# Altium PCB standos.PcbDoc (part 2 of 2)
Units mil, origin at the board's own origin, x right, y up, seen from the top; angles counter-clockwise.
Board outline 11023.62 x 8464.57 mil, 2 copper layers (Top Layer, Bottom Layer); 116 components, 136 nets, 701 pads, 0 vias.
Unrouted connection lines stored in the file: 409.
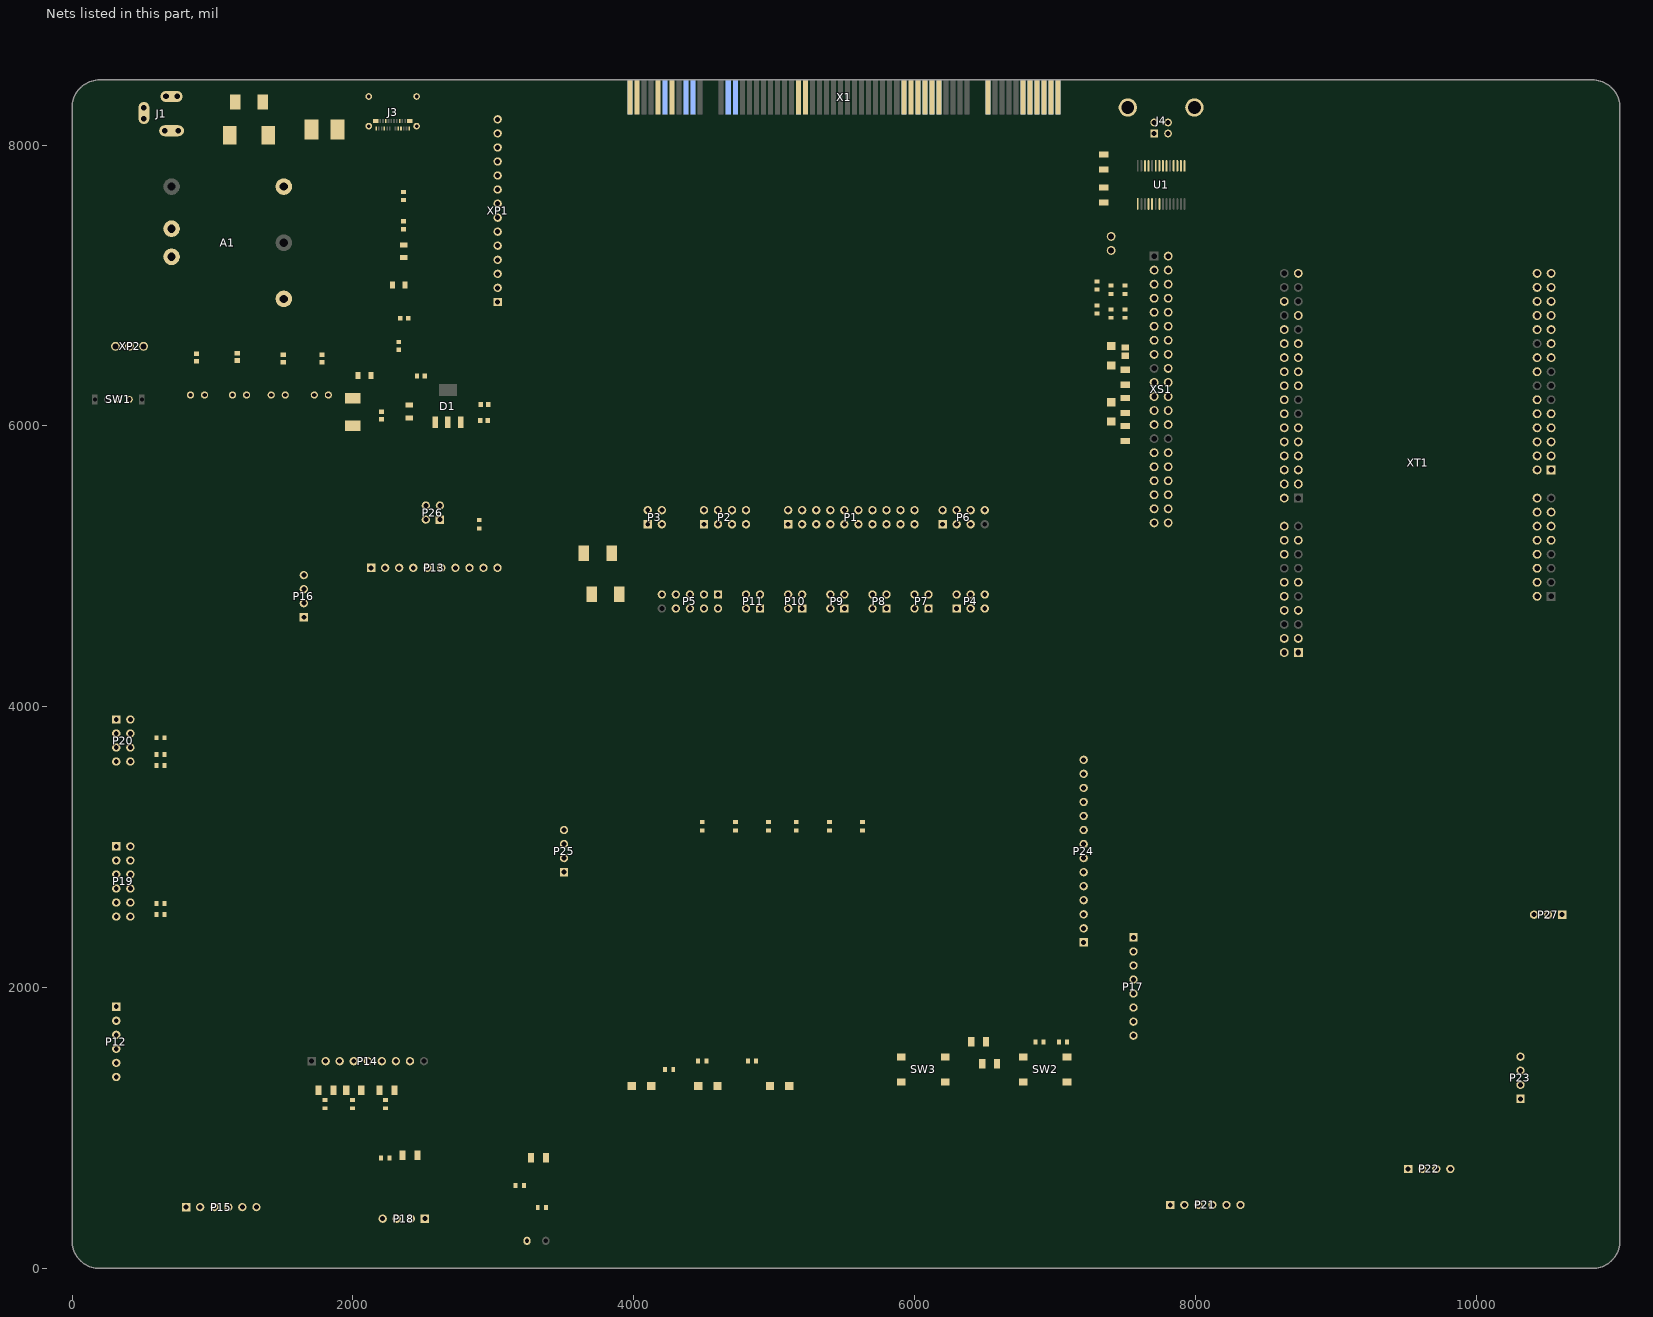
[diagram p2: the nets of this part, all layers, seen from the top]

## Part data
C1 C6 C8 C9 C13 C14 C15 C16 C17 C18 C19 C20 C21 C22 C23 C24: "Capacitor (Semiconductor SIM Model)", LatestRevisionDate=29-May-2009, LatestRevisionNote="IPC-7351 Footprint Added.", PackageDescription="Chip Capacitor", PackageReference=C1206, Published=8-Jun-2000, Publisher="Altium Limited"
C2 C3: "Polarized Capacitor (Surface Mount)", Voltage=50V, LatestRevisionDate=29-May-2009, LatestRevisionNote="IPC-7351 Footprint Added.", PackageDescription="Chip Capacitor", PackageReference=C0805, Published=8-Jun-2000, Publisher="Altium Limited"
C4: "Polarized Capacitor (Surface Mount)", Voltage=10V, LatestRevisionDate=29-May-2009, LatestRevisionNote="IPC-7351 Footprint Added.", PackageDescription=E-case, PackageReference=C0805, Published=8-Jun-2000, Publisher="Altium Limited"
C5: "Capacitor (Semiconductor SIM Model)", PartNumber=TCC1206X7R105K500HT, Voltage=50V, LatestRevisionDate=29-May-2009, LatestRevisionNote="IPC-7351 Footprint Added.", PackageDescription="Chip Capacitor", PackageReference=C1206, Published=8-Jun-2000, Publisher=https://www.smd.ru/katalog/kondensatory/keramicheskie/1206_1210/
C7 C12: "Polarized Capacitor (Surface Mount)", LatestRevisionDate=29-May-2009, LatestRevisionNote="IPC-7351 Footprint Added.", PackageDescription="Chip Capacitor", PackageReference=C0805, Published=8-Jun-2000, Publisher="Altium Limited"
C10: Case=0603, Dielectric=X7R, PartNumber=GRM188R71H104KA93D, Tolerance=±10%, Voltage="50 B"
C11: Case=0603, Dielectric=X5R, PartNumber=GRM188R60J106ME84D, Tolerance=±20%, Voltage="6,3 B"
D1: Case=SOT-223, Manufacturer="ST Microelectronics", PartNumber=LD1117S33CTR
D2 D3 D4 D5 D6: "Typical RED, GREEN, YELLOW, AMBER GaAs LED", LatestRevisionDate=17-Jul-2002, LatestRevisionNote="Re-released for DXP Platform.", PackageDescription="SM LED; 2 Flat Leads", PackageReference=3.2X1.6X1.1, PackageVersion=Feb-2002, Published=8-Jun-2000, Publisher="Altium Limited"
F1 F2 F4 F5: library part F, "045303.5MR"
J1: "Low Voltage Power Supply Connector", ComponentLink1Description="Manufacturer Link", ComponentLink1URL=http://domino.kycon.com/internet/Products.html, DatasheetDocument=09-May-2002, Published=17-Dec-2003, Publisher="Altium Limited"
J2: "Diode Schottky 60V 5A Surface Mount SMC (DO-214AB)", Package="DO-214AB-214 Diotec Semiconductor", Availability="In Stock", Check_prices=https://www.snapeda.com/parts/SK56/Diotec/view-part/5719358/?ref=eda, MF="Diotec Semiconductor", MP=SK56, Price=None, SnapEDA_Link=https://www.snapeda.com/parts/SK56/Diotec/view-part/5719358/?ref=snap
J3: Package=None, Availability=Unavailable, MP=105450-0101, Price=None
J4: "USB-B (USB TYPE-B) USB 2.0 Receptacle Connector 4 Position Through Hole, Right Angle", Package=None, Availability=Unavailable, MP=USB-B-S-X-X-TH, Price=None
L1: "Power Choke Shielded Wirewound 4.7uH 20% 100KHz Metal 4.8A 39.6mOhm DCR Automotive T/R", Package="SMD-2 Panasonic", Availability="In Stock", Check_prices=https://www.snapeda.com/parts/ETQP4M4R7YFP/Panasonic/view-part/1533841/?ref=eda, MF=Panasonic, MP=ETQP4M4R7YFP, Price=None, Purchase-URL=https://pricing.snapeda.com/search/part/ETQP4M4R7YFP/?ref=eda, SnapEDA_Link=https://www.snapeda.com/parts/ETQP4M4R7YFP/Panasonic/view-part/1533841/?ref=snap
P1: "Header, 10-Pin, Dual row", LatestRevisionDate=17-Jul-2002, LatestRevisionNote="Re-released for DXP Platform.", Publisher="Altium Limited"
P2 P6 P20: "Header, 4-Pin, Dual row", LatestRevisionDate=17-Jul-2002, LatestRevisionNote="Re-released for DXP Platform.", Publisher="Altium Limited"
P3 P7 P8 P9 P10 P11 P26: "Header, 2-Pin, Dual row", LatestRevisionDate=17-Jul-2002, LatestRevisionNote="Re-released for DXP Platform.", Publisher="Altium Limited"
P4: "Header, 3-Pin, Dual row", LatestRevisionDate=17-Jul-2002, LatestRevisionNote="Re-released for DXP Platform.", Publisher="Altium Limited"
P5: "Header, 5-Pin, Dual row", LatestRevisionDate=17-Jul-2002, LatestRevisionNote="Re-released for DXP Platform.", Publisher="Altium Limited"
P12 P15 P21: "Header, 6-Pin", LatestRevisionDate=17-Jul-2002, LatestRevisionNote="Re-released for DXP Platform.", Publisher="Altium Limited"
P13: "Header, 10-Pin", LatestRevisionDate=17-Jul-2002, LatestRevisionNote="Re-released for DXP Platform.", Publisher="Altium Limited"
P14: "Header, 9-Pin", LatestRevisionDate=17-Jul-2002, LatestRevisionNote="Re-released for DXP Platform.", Publisher="Altium Limited"
P16 P18 P22 P23 P25: "Header, 4-Pin", LatestRevisionDate=17-Jul-2002, LatestRevisionNote="Re-released for DXP Platform.", Publisher="Altium Limited"
P17: "Header, 8-Pin", LatestRevisionDate=17-Jul-2002, LatestRevisionNote="Re-released for DXP Platform.", Publisher="Altium Limited"
P19: "Header, 6-Pin, Dual row", LatestRevisionDate=17-Jul-2002, LatestRevisionNote="Re-released for DXP Platform.", Publisher="Altium Limited"
P24 XP1: "Header, 14-Pin", LatestRevisionDate=17-Jul-2002, LatestRevisionNote="Re-released for DXP Platform.", Publisher="Altium Limited"
P27: "Header, 3-Pin", LatestRevisionDate=17-Jul-2002, LatestRevisionNote="Re-released for DXP Platform.", Publisher="Altium Limited"
R1 R3 R4: Case=0603, PartNumber=RC0603JR-07330кL, Power="0,1 Вт", Tolerance=±5%
R2 R6 R7 R8 R9 R10 R11 R12 R14 R15 R16 R17 R18 R19 R20 R21 R22 R23 R24 R25 R26 R27 R28 R29 R31 R32 R33 R34 R35 R36: "Resistor", LatestRevisionDate=29-May-2009, LatestRevisionNote="IPC-7351 Footprint Added.", PackageDescription="Chip Resistor", PackageReference=J1-0603, Published=8-Jun-2000, Publisher="Altium Limited"
R5: Case=0603, PartNumber=RC0603JR-07150кL, Power="0,1 Вт", Tolerance=±5%
R13: library part "Light Sensor", PartNumber=GL5516
SW1: library part SW, PartNumber=KLS7-SS03-12D02-EG-3.0
SW2 SW3: "WS-TASV SMD Tact Switch 6X6 mm", ComponentLink1Description="Manufacturer URL", ComponentLink1URL=http://www.we-online.com, ComponentLink2Description=Datasheet, ComponentLink2URL=http://katalog.we-online.de/em/datasheet/4301x2.pdf, NoPins=04, PackageReference=430152043826, PartNumber=430152043826
U1: "USB UART Asynchronous Serial Data Transfer Chip, 28-pin SSOP, Tape and Reel", Manufacturer=FTDI, ComponentLink1Description="Manufacturer URL", ComponentLink1URL=http://www.ftdichip.com/, ComponentLink2Description=Datasheet, ComponentLink2URL=http://www.ftdichip.com/Support/Documents/DataSheets/ICs/DS_FT232R.pdf, DatasheetVersion="ver 2.10, Mar-2012", PackageDescription="28-Pin Small Outline Package 0.65 mm Pitch", PackageReference=SSOP-28, PackageVersion=Mar-12, PartNumber=FT232RL-Reel
VD1: library part VD, PartNumber=GNL-3012HD
VD2: library part VD, PartNumber=GNL-3012YD
VD3: library part VD, PartNumber=GNL-3012GD
VD4: library part VD, PartNumber=GNL-3014BC
XP2: library part JP3, PartNumber=PLS-3
XP3: library part JP2, PartNumber=MJ-O-8KLS, Company="KLS electronic co ltd"
XS1: 1=VCC3V3, 2=VCC5V, 3=GPIO2/SDA1, 4=VCC5V, 5=GPIO3/SCL1, 6=GND, 7=GPIO4/GPIO_GCLK, 8=GPIO14/TXD0, 9=GND, 10=GPIO15/RXD0, 11=GPIO17/GPIO_GEN0, 12=GPIO18/GPIO_GEN1, 13=GPIO27/GPIO_GEN2, 14=GND, 15=GPIO22/GPIO_GEN3, 16=GPIO23/GPIO_GEN4, 17=VCC3V3, 18=GPIO24/GPIO_GEN5, 19=GPIO10/SPI_MOSI, 20=GND, 21=GPIO9/SPI_MISO, 22=GPIO25/GPIO_GEN6, 23=GPIO11/SPI_SCLK, 24=GPIO8/SPI_CE0_N, 25=GND, 26=GPIO7/SPI_CE1_N, 27=ID_SD, 28=ID_SC, 29=GPIO5, 30=GND, 31=GPIO6, 32=GPIO12, 33=GPIO13, 34=GND, 35=GPIO19, 36=GPIO16, 37=GPIO26, 38=GPIO20, 39=GND, 40=GPIO21

## Nets (pads, with @x,y where several pads share a name; then routed paths per layer and width w, separated by ;. In a path a pad name is that pad's centre, name@x,y a point inside that pad or via, vN(x,y) a via of type N, cw(c..) or ccw(c..) an arc to the next point about the centre after c; other vN are vias at no path point)
3V3: C11.2 D1.2 F4.1 P1.19 R5.1 R6.1 R7.1
5V: C10.2 D1.1 F2.1 R4.1 SW1.2
+5VIN: X1.A3 X1.A4 X1.A5 XP1.14
+15VIN: X1.B1 X1.B2 XP1.12
-15VIN: X1.A1 X1.A2 XP1.13
ACH0+: X1.A48 XP1.6
ACH1+: X1.A47 XP1.5
ADC.ALRT: P3.2 P13.5 XT1.CN9_3
ADC.I2C.SCL: P12.3 P13.8 P20.4 R6.2 XS1.5 XT1.CN7_2
ADC.I2C.SDA: P12.4 P13.7 P20.6 R7.2 XS1.3 XT1.CN7_4
ADC_A0: C18.1 P13.4 R15.2
ADC_A1: C23.1 P13.3 R23.2
ADC_A2: P13.2 P26.4
ADC_A3: P13.1 P26.2
ADC_ADDR: P13.6 R12.2
BTN0: C22.2 R22.2 SW2.1 SW2.3 XS1.15 XT1.CN9_17
BTN1: C24.2 R24.2 SW3.1 SW3.3 XS1.16 XT1.CN7_20
C5V: C12.1 C13.2 C14.2 F2.2 F5.1 P1.20 U1.20 XP3.2 XS1.2 XS1.4 XT1.CN8_9
CLRSENS_INT: P3.3 P12.1 XT1.CN10_33
CLRSENS_RST: P3.4 P12.2 XT1.CN9_22
Current_Hi: X1.B58 XP1.4
Current_Low: X1.A57 XP1.3
DISPLAY.LCD.DC/RS: P5.7 P24.5 XT1.CN8_2
DISPLAY.LCD.RESET: P5.8 P24.4 XT1.CN8_4
DISPLAY.LCD.SPI.MISO: P5.5 P24.9 P24.13 P25.3 R34.2 R35.2 R36.2 XT1.CN9_24
DISPLAY.LCD.SPI.MOSI: P5.6 P24.6 P24.12 P25.2 XT1.CN9_28
DISPLAY.LCD.SPI.nCE: P5.3 P24.3 R31.1 XT1.CN10_11
DISPLAY.LCD.SPI.SCLK: P5.4 P24.7 P24.10 P25.4 XT1.CN9_26
DISPLAY.SDCARD.nCE: P5.1 P25.1 R33.1 XT1.CN10_7
DISPLAY.TOUCH.IRQ: P5.9 P24.14 XT1.CN9_25
DISPLAY.TOUCH.SPI.nCE: P5.2 P24.11 R32.1 XT1.CN10_9
ENCODER.A: P8.1 P15.1 XT1.CN8_14
ENCODER.B: P8.2 P15.2 XT1.CN10_2
ENCODER.BTN: P8.3 P15.3 XT1.CN8_16
ENCODER.SWT: P8.4 P15.4 XT1.CN10_12
FT_3V3: C15.2 R10.2 R11.2 U1.4 U1.17
FT_D_N: R8.1 U1.16
FT_D_P: R9.1 U1.15
FT_RXLED: D3.2 U1.22
FT_TXLED: D2.2 U1.23
FUNC_OUT: X1.A54 XP1.8
GND: A1.6 C4.2 C6.1 C7.2 C8.1 C9.1 C10.1 C11.1 C12.2 C13.1 C14.1 C15.1 C16.1 C17.1 C18.2 C19.2 C20.2 C21.2 C22.1 C23.2 C24.1 D1.3 D4.2 D5.2 D6.2 J3.A1 J3.A12 J3.B1 J3.B12 J3.S1 J3.S2 J3.S3 J3.S4 J4.4 J4.S1 J4.S2 P1.12 P12.5 P13.9 P15.5 P17.6 P18.3 P19.5 P19.11 P20.8 P21.5 P22.4 P23.4 P24.2 P26.1 P26.3 R2.1 R12.1 R14.2 R29.1 R34.1 R35.1 R36.1 SW2.2 SW2.4 SW3.2 SW3.4 U1.7 U1.18 U1.21 U1.25 U1.26 VD1.2 VD2.2 VD3.2 VD4.2 X1.A6 X1.A11 X1.A18 X1.A19 X1.A20 X1.A21 X1.A23 X1.B3 X1.B4 X1.B5 X1.B6 X1.B11 X1.B18 X1.B19 X1.B20 X1.B21 X1.B22 X1.B23 X1.B37 X1.B56 X1.B61 XP1.11 XS1.6 XS1.9 XS1.14 XS1.20 XS1.25 XS1.30 XS1.34 XS1.39 XT1.CN7_8 XT1.CN8_11 XT1.CN8_13 XT1.CN9_12 XT1.CN9_23 XT1.CN10_3 XT1.CN10_5 XT1.CN10_17 XT1.CN10_22 XT1.CN10_27
GYRO_CS: P9.1 P20.3 R28.1 XT1.CN9_16
GYRO_DR: P9.2 P20.5 XT1.CN10_20
GYRO_INT: P9.3 P20.7 XT1.CN9_18
GYRO_SDO: P9.4 P20.1 R29.2 XT1.CN10_18
KEYPAD.Col0: C19.1 P6.1 R18.1 XT1.CN9_27
KEYPAD.Col1: C20.1 P6.3 R17.1 XT1.CN8_12
KEYPAD.Col2: C21.1 P6.5 R16.1 XT1.CN9_8
KEYPAD.Row0: P6.2 P14.3 XT1.CN9_6
KEYPAD.Row1: P6.4 P14.8 XT1.CN9_4
KEYPAD.Row2: P6.6 P14.7 XT1.CN9_2
KEYPAD.Row3: P6.8 P14.5 XT1.CN10_23
Keypad_C0: P14.4 R18.2
Keypad_C1: P14.2 R17.2
Keypad_C2: P14.6 R16.2
LED0: R19.1 XS1.18 XT1.CN10_4
LED1: R20.1 XS1.19 XT1.CN10_6
LED2: R21.1 XS1.21 XT1.CN10_10
MAXSONAR.AN: P11.3 P21.1 XT1.CN9_21
MAXSONAR.PWM: P11.4 P21.4 XT1.CN9_19
MAXSONAR.UART.RX: P11.2 P21.2 XT1.CN9_29
MAXSONAR.UART.TX: P11.1 P21.3 XT1.CN9_30
MICROPHONE_AS: P18.4 R23.1
MICROPHONE_DS: P3.1 P18.1 XT1.CN7_3
NAV.DRDY_M: P2.7 P19.8 XT1.CN7_12
NAV.INT: P2.8 P19.7 XT1.CN9_7
NAV.SPI_3CS.MISO: P2.1 P19.3 XT1.CN8_8
NAV.SPI_3CS.MOSI: P2.2 P19.2 XT1.CN8_10
NAV.SPI_3CS.nCE0: P2.3 P19.1 R26.1 XT1.CN7_17
NAV.SPI_3CS.nCE1: P2.4 P19.9 R25.1 XT1.CN9_1
NAV.SPI_3CS.nCE2: P2.5 P19.10 R27.1 XT1.CN7_10
NAV.SPI_3CS.SCLK: P2.6 P19.4 XT1.CN8_6
NetA1_2: A1.2 C2.2 C3.2 C5.2 C6.2 J1.2 J1.2A J1.2B J1.3 J1.3A J1.3B
NetA1_3: A1.3 C1.2 C3.1 L1.2
NetC2_1: C2.1 C5.1 J2.2 L1.1
NetD2_1: D2.1 R10.1
NetD3_1: D3.1 R11.1
NetD4_1: D4.1 R19.2
NetD5_1: D5.1 R20.2
NetD6_1: D6.1 R21.2
NetF1_1: F1.1 J1.1 J1.1A J1.1B
NetF1_2: F1.2 J2.1
NetJ3_A5: J3.A5 R2.2
NetJ4_1: J4.1 XP3.1
NetP23_2: P23.2 P27.2
NetR1_2: R1.2 VD1.1
NetR3_2: R3.2 VD2.1
NetR4_2: R4.2 VD3.1
NetR5_2: R5.2 VD4.1
NetR13_2: R13.2 R14.1 R15.1
NetSW1_1: SW1.1 XP2.2
P3V3: F4.2 P12.6 P17.8 P24.8 R22.1 R24.1 R25.2 R26.2 R27.2 R28.2 R31.2 R32.2 R33.2
P5V: F5.2 P13.10 P15.6 P18.2 P19.6 P19.12 P20.2 P21.6 P22.1 P23.1 P24.1
PWR_5V: A1.4 C1.1 C4.1 R3.1 XP2.3
RC522_IRQ: P4.5 P17.5 XT1.CN7_1
RC522_MISO: P4.1 P17.4 XT1.CN9_9
RC522_MOSI: P4.2 P17.3 XT1.CN9_5
RC522_RST: P4.6 P17.7 XT1.CN7_11
RC522_SCK: P4.4 P17.2 XT1.CN9_10
RC522_SS: P4.3 P17.1 XT1.CN7_7
RPi_GPIO04: P1.8 XS1.7
RPi_GPIO05: P1.10 XS1.29
RPi_GPIO06: P1.11 XS1.31
RPi_GPIO07: P1.9 XS1.26
RPi_GPIO08: P1.15 XS1.24
RPi_GPIO11: P1.16 XS1.23
RPi_GPIO12: P1.14 XS1.32
RPi_GPIO13: P1.13 XS1.33
RPi_GPIO14: U1.5 XS1.8 XT1.CN10_14
RPi_GPIO15: U1.1 XS1.10 XT1.CN10_16
RPi_GPIO16: P1.1 XS1.36
RPi_GPIO17: P1.2 XS1.11
RPi_GPIO18: P1.3 XS1.12
RPi_GPIO19: P1.5 XS1.35
RPi_GPIO20: P1.6 XS1.38
RPi_GPIO21: P1.4 XS1.40
RPi_GPIO25: P1.7 XS1.22
RPi_GPIO26: P1.17 XS1.37
RPi_GPIO27: P1.18 XS1.13
STEPMOTOR.IN1: P10.1 P16.1 XT1.CN10_24
STEPMOTOR.IN2: P10.2 P16.2 XT1.CN10_26
STEPMOTOR.IN3: P10.3 P16.3 XT1.CN10_8
STEPMOTOR.IN4: P10.4 P16.4 XT1.CN10_30
STM_PD12: P7.1 P22.2 P27.1 XT1.CN10_21
STM_PD13: P7.3 P27.3 XT1.CN10_19
STM_PD14: P7.2 P22.3 XT1.CN7_16
STM_PD15: P7.4 P23.3 XT1.CN7_18
Supply+: X1.B62 XP1.9
Supply-: X1.A62 XP1.10
SYNC_OUT: X1.A53 XP1.7
USB_5V: C7.1 C8.2 C9.2 J3.A4 J3.A9 J3.B4 J3.B9 R1.1 XP2.1
USB_D_N: C16.2 J4.3 R8.2
USB_D_P: C17.2 J4.2 R9.2
Voltage_Hi: X1.A38 XP1.2
Voltage_Low: X1.B38 XP1.1
pads on no net: A1.1 A1.5 D1.4 J3.A2 J3.A3 J3.A6 J3.A7 J3.A8 J3.A10 J3.A11 J3.B2 J3.B3 J3.B5 J3.B6 J3.B7 J3.B8 J3.B10 J3.B11 P5.10 P6.7 P14.1 P14.9 R13.1 SW1.0 SW1.3 U1.2 U1.3 U1.6 U1.8 U1.9 U1.10 U1.11 U1.12 U1.13 U1.14 U1.19 U1.24 U1.27 U1.28 X1.A7 X1.A8 X1.A9 X1.A10 X1.A14 X1.A15 X1.A16 X1.A17 X1.A22 X1.A24 X1.A25 X1.A26 X1.A27 X1.A28 X1.A29 X1.A30 X1.A31 X1.A32 X1.A33 X1.A34 X1.A35 X1.A36 X1.A37 X1.A39 X1.A40 X1.A41 X1.A42 X1.A43 X1.A44 X1.A45 X1.A46 X1.A49 X1.A52 X1.A55 X1.A56 X1.A58 X1.A59 X1.A60 X1.A61 X1.B7 X1.B8 X1.B9 X1.B10 X1.B14 X1.B15 X1.B16 X1.B17 X1.B24 X1.B25 X1.B26 X1.B27 X1.B28 X1.B29 X1.B30 X1.B31 X1.B32 X1.B33 X1.B34 X1.B35 X1.B36 X1.B39 X1.B40 X1.B41 X1.B42 X1.B43 X1.B44 X1.B45 X1.B46 X1.B47 X1.B48 X1.B49 X1.B52 X1.B53 X1.B54 X1.B55 X1.B57 X1.B59 X1.B60 XS1.1 XS1.17 XS1.27 XS1.28 XT1.CN7_5 XT1.CN7_6 XT1.CN7_9 XT1.CN7_13 XT1.CN7_14 XT1.CN7_15 XT1.CN7_19 XT1.CN8_1 XT1.CN8_3 XT1.CN8_5 XT1.CN8_7 XT1.CN8_15 XT1.CN9_11 XT1.CN9_13 XT1.CN9_14 XT1.CN9_15 XT1.CN9_20 XT1.CN10_1 XT1.CN10_13 XT1.CN10_15 XT1.CN10_25 XT1.CN10_28 XT1.CN10_29 XT1.CN10_31 XT1.CN10_32 XT1.CN10_34

## Silkscreen, mask and mechanical layers (free items; w line width, h text height)
Top Overlay:
  drawing of 392 lines, arcs and shapes, not listed
  text "BREADBOARD" at 4015.75,7992.13 h60
  text "POWER" at 122.05,7929.13 h47.24
  text "NI ELVIS PCI" at 2850.39,7161.42 h60 r90
  text "SYB-46" at 5236.22,7007.87 h60
  text "GY-50 GYRO" at 196.85,5708.66 h60
  text "ADS1115" at 2125.98,5708.66 h60
  text "COMMUTATION" at 3582.68,5708.66 h60
  text "IN4" at 1372.05,4952.76 h39.37 r180
  text "IN3" at 1372.05,4854.33 h39.37 r180
  text "IN2" at 1372.05,4755.91 h39.37 r180
  text "IN1" at 1372.05,4657.48 h39.37 r180
  text "DISPLAY MSP3520" at 3556.03,4095.6 h60
  text "GY-50 GYRO" at 157.48,4094.49 h60
  text "KEYBOARD COM-08653" at 1220.47,4094.49 h60
  text "PMOD NAV" at 206.85,3198.98 h60
  text "RFID RC522" at 7608.43,2805.28 h60
  text "PMOD COLOR" at 128.11,2096.61 h60
  text "LEDS" at 3868.27,1624.17 h60
  text "BUTTONS" at 5758.03,1624.17 h60
  text "ENCODER PMODENC" at 639.92,994.25 h60
  text "MICROPHONE KY-038" at 1860.39,994.25 h60
  text "GL5516" at 3159.61,994.25 h60
  text "Pmod MAXSONAR" at 7608.43,994.25 h60
  text "ULTRASONIC HC-SR04" at 8868.27,994.25 h60
Bottom Overlay:
  circle w3.94: c8094.49,1338.58 r157.48
  circle w3.94: c8094.49,2677.17 r157.48
  circle w3.94: c9543.31,2496.06 r157.48
  circle w3.94: c9543.31,1519.69 r157.48
  circle w3.94: c6781.5,7608.27 r196.85
  circle w3.94: c6781.5,6328.74 r196.85
  circle w3.94: c3927.17,7608.27 r196.85
  circle w3.94: c3927.17,6328.74 r196.85
  circle w3.94: c2130,4500 r157.48
  circle w3.94: c3030,4500 r157.48
  circle w3.94: c1368.11,4498.03 r157.48
  circle w3.94: c206.69,4498.03 r157.48
  circle w3.94: c206.69,5541.34 r157.48
  circle w3.94: c1368.11,5541.34 r157.48
  circle w3.94: c7165.35,1998.03 r196.85
  circle w3.94: c3543.31,1998.03 r196.85
  circle w3.94: c7165.35,3946.85 r196.85
  circle w3.94: c3543.31,3946.85 r196.85
  circle w3.94: c3011.81,3996.06 r157.48
  circle w3.94: c1200.79,1673.23 r157.48
  circle w3.94: c1200.79,3996.06 r157.48
  circle w3.94: c3011.81,1673.23 r157.48
  circle w3.94: c2795.28,196.85 r157.48
  circle w3.94: c2795.28,826.77 r157.48
  circle w3.94: c1929.13,826.77 r157.48
  circle w3.94: c1929.13,196.85 r157.48
  circle w3.94: c629.92,826.77 r157.48
  circle w3.94: c629.92,196.85 r157.48
  circle w3.94: c1496.06,196.85 r157.48
  circle w3.94: c1496.06,826.77 r157.48
  circle w3.94: c10826.77,629.92 r157.48
  circle w3.94: c10118.11,905.51 r157.48
  circle w3.94: c10826.77,2086.61 r157.48
  circle w3.94: c10196.85,2086.61 r157.48
  circle w3.94: c8503.94,196.85 r157.48
  circle w3.94: c7637.8,196.85 r157.48
  circle w3.94: c10393.7,196.85 r157.48
  circle w3.94: c8937.01,826.77 r157.48
  circle w3.94: c8937.01,196.85 r157.48
  circle w3.94: c8503.94,826.77 r157.48
  circle w3.94: c7637.8,826.77 r157.48
  circle w3.94: c8326.77,7401.57 r236.22
  circle w3.94: c10255.91,7401.57 r236.22
  circle w3.94: c10255.91,5118.11 r236.22
  circle w3.94: c8326.77,5118.11 r236.22
Mechanical 1:
  lines w10: 4509.33,8192.73 4509.35,8192.73 ; 4509.33,8464.57 4509.35,8464.57 ; 4584.53,8464.57 4584.54,8464.57
Board:
  circle w3.94: c8094.49,1338.58 r62.99
  circle w3.94: c8094.49,2677.17 r62.99
  circle w3.94: c9543.31,2496.06 r62.99
  circle w3.94: c9543.31,1519.69 r62.99
  circle w3.94: c6781.5,7608.27 r78.74
  circle w3.94: c6781.5,6328.74 r78.74
  circle w3.94: c3927.17,7608.27 r78.74
  circle w3.94: c3927.17,6328.74 r78.74
  circle w3.94: c2130,4500 r47.24
  circle w3.94: c3030,4500 r47.24
  circle w3.94: c1368.11,4498.03 r62.99
  circle w3.94: c206.69,4498.03 r62.99
  circle w3.94: c206.69,5541.34 r62.99
  circle w3.94: c1368.11,5541.34 r62.99
  circle w3.94: c3011.81,3996.06 r47.24
  circle w3.94: c7165.35,1998.03 r62.99
  circle w3.94: c3543.31,1998.03 r62.99
  circle w3.94: c7165.35,3946.85 r62.99
  circle w3.94: c3543.31,3946.85 r62.99
  circle w3.94: c1200.79,1673.23 r47.24
  circle w3.94: c3011.81,1673.23 r47.24
  circle w3.94: c1200.79,3996.06 r47.24
  circle w3.94: c1929.13,826.77 r47.24
  circle w3.94: c1496.06,826.77 r47.24
  circle w3.94: c2795.28,826.77 r47.24
  circle w3.94: c629.92,826.77 r47.24
  circle w3.94: c1929.13,196.85 r47.24
  circle w3.94: c2795.28,196.85 r47.24
  circle w3.94: c629.92,196.85 r47.24
  circle w3.94: c1496.06,196.85 r47.24
  circle w3.94: c10118.11,905.51 r47.24
  circle w3.94: c10196.85,2086.61 r47.24
  circle w3.94: c10826.77,2086.61 r47.24
  circle w3.94: c10826.77,629.92 r47.24
  circle w3.94: c8503.94,196.85 r47.24
  circle w3.94: c7637.8,196.85 r47.24
  circle w3.94: c8937.01,196.85 r47.24
  circle w3.94: c10393.7,196.85 r47.24
  circle w3.94: c8937.01,826.77 r47.24
  circle w3.94: c8503.94,826.77 r47.24
  circle w3.94: c7637.8,826.77 r47.24
  circle w3.94: c8326.77,7401.57 r59.06
  circle w3.94: c10255.91,7401.57 r59.06
  circle w3.94: c10255.91,5118.11 r59.06
  circle w3.94: c8326.77,5118.11 r59.06
  circle w3.94: c10826.77,196.85 r82.68
  circle w3.94: c10826.77,8267.72 r82.68
  circle w3.94: c196.85,8267.72 r82.68
  circle w3.94: c196.85,196.85 r82.68
  lines w3.94: 4584.54,8192.33 4584.54,8464.57 4509.33,8464.57 4509.33,8192.73 ccw(c4546.95,8192.73) 4584.55,8192.73 ; 0,196.85 ccw(c196.85,196.85) 196.85,0 10826.77,0 ccw(c10826.77,196.85) 11023.62,196.85 11023.62,8267.72 ccw(c10826.77,8267.72) 10826.77,8464.57 196.85,8464.57 ccw(c196.85,8267.72) 0,8267.72 0,196.85 ; 3700.91,8154.72 3937.11,8154.72 3937.11,8464.57 3700.91,8464.57 3700.91,8154.72 ; 3740.16,393.7 ccw(c3937.01,393.7) 3937.01,196.85 7086.61,196.85 ccw(c7086.61,393.7) 7283.46,393.7 7283.46,787.4 ccw(c7086.61,787.4) 7086.61,984.25 3937.01,984.25 ccw(c3937.01,787.4) 3740.16,787.4 3740.16,393.7 ; 7059.33,8154.72 7295.57,8154.72 7295.57,8464.57 7059.33,8464.57 7059.33,8154.72

## Text inside footprints (layer, text, board x,y; h text height)
A1: Top Overlay "URB_LD-20WR3" at 405.9,6924.96 h137.8; Top Overlay "GND" at 410.11,7353.57 h137.8; Top Overlay "Vin" at 408.96,7151.01 h137.8; Top Overlay "+Vo" at 1599.59,6842.84 h137.8; Top Overlay "Trim" at 1599.59,7261.64 h137.8; Top Overlay "0V" at 1599.33,7669.48 h137.8; Top Overlay "Ctrl" at 364.97,7643.71 h137.8
J1: Mechanical 1 "Alert PCB fab to slot details" at 947.48,8630.47 h11.81 r270; Mechanical 1 "Assign keep-out area to slot" at 967.16,8630.47 h11.81 r270; Mechanical 1 "Mech 1 - Slot cut-out" at 927.79,8630.47 h11.81 r270; Mechanical 1 "Mech 2 - Clearance, move to internal plane if present" at 908.11,8630.47 h11.81 r270
P1: Top Overlay "2" at 5000,5380 h50; Top Overlay "1" at 5000,5280 h50; Top Overlay "19" at 6060,5280 h50; Top Overlay "20" at 6060,5380 h50
P2: Top Overlay "2" at 4400,5380 h50; Top Overlay "1" at 4420,5280 h50; Top Overlay "7" at 4860,5280 h50; Top Overlay "8" at 4860,5380 h50
P3: Top Overlay "1" at 4020,5280 h50; Top Overlay "2" at 4000,5380 h50; Top Overlay "4" at 4260,5380 h50; Top Overlay "3" at 4260,5280 h50
P4: Top Overlay "1" at 6220,4680 h50; Top Overlay "2" at 6200,4780 h50; Top Overlay "5" at 6560,4680 h50; Top Overlay "6" at 6560,4780 h50
P5: Top Overlay "10" at 4140,4720 h50 r180; Top Overlay "9" at 4140,4820 h50 r180; Top Overlay "1" at 4680,4820 h50 r180; Top Overlay "2" at 4700,4720 h50 r180
P6: Top Overlay "8" at 6560,5380 h50; Top Overlay "7" at 6560,5280 h50; Top Overlay "1" at 6120,5280 h50; Top Overlay "2" at 6100,5380 h50
P7: Top Overlay "3" at 6120,4860 h50 r90; Top Overlay "4" at 6020,4860 h50 r90; Top Overlay "2" at 6020,4600 h50 r90; Top Overlay "1" at 6120,4620 h50 r90
P8: Top Overlay "3" at 5820,4860 h50 r90; Top Overlay "4" at 5720,4860 h50 r90; Top Overlay "2" at 5720,4600 h50 r90; Top Overlay "1" at 5820,4620 h50 r90
P9: Top Overlay "3" at 5520,4860 h50 r90; Top Overlay "4" at 5420,4860 h50 r90; Top Overlay "2" at 5420,4600 h50 r90; Top Overlay "1" at 5520,4620 h50 r90
P10: Top Overlay "3" at 5220,4860 h50 r90; Top Overlay "4" at 5120,4860 h50 r90; Top Overlay "2" at 5120,4600 h50 r90; Top Overlay "1" at 5220,4620 h50 r90
P11: Top Overlay "3" at 4920,4860 h50 r90; Top Overlay "4" at 4820,4860 h50 r90; Top Overlay "2" at 4820,4600 h50 r90; Top Overlay "1" at 4920,4620 h50 r90
P19: Top Overlay "2" at 394.96,3105.91 h50 r270; Top Overlay "1" at 294.96,3105.91 h50 r270; Top Overlay "1" at 294.96,2425.91 h50 r270; Top Overlay "1" at 294.96,2385.91 h50 r270; Top Overlay "12" at 394.96,2425.91 h50 r270
P20: Top Overlay "8" at 394.96,3549.84 h50 r270; Top Overlay "7" at 294.96,3549.84 h50 r270; Top Overlay "1" at 294.96,3989.84 h50 r270; Top Overlay "2" at 394.96,4009.84 h50 r270
P26: Top Overlay "1" at 2639.68,5253.07 h50 r90; Top Overlay "2" at 2539.68,5233.07 h50 r90; Top Overlay "4" at 2539.68,5493.07 h50 r90; Top Overlay "3" at 2639.68,5493.07 h50 r90
XT1: Top Overlay "CN8" at 10573.07,4676.61 h60 r180; Top Overlay "CN9" at 10573.07,7226.61 h60 r180; Top Overlay "CN7" at 8773.07,4276.61 h60 r180; Top Overlay "CN10" at 8773.07,7226.61 h60 r180